# EAGLE board soundMeter_manual (EAGLE 6.3)
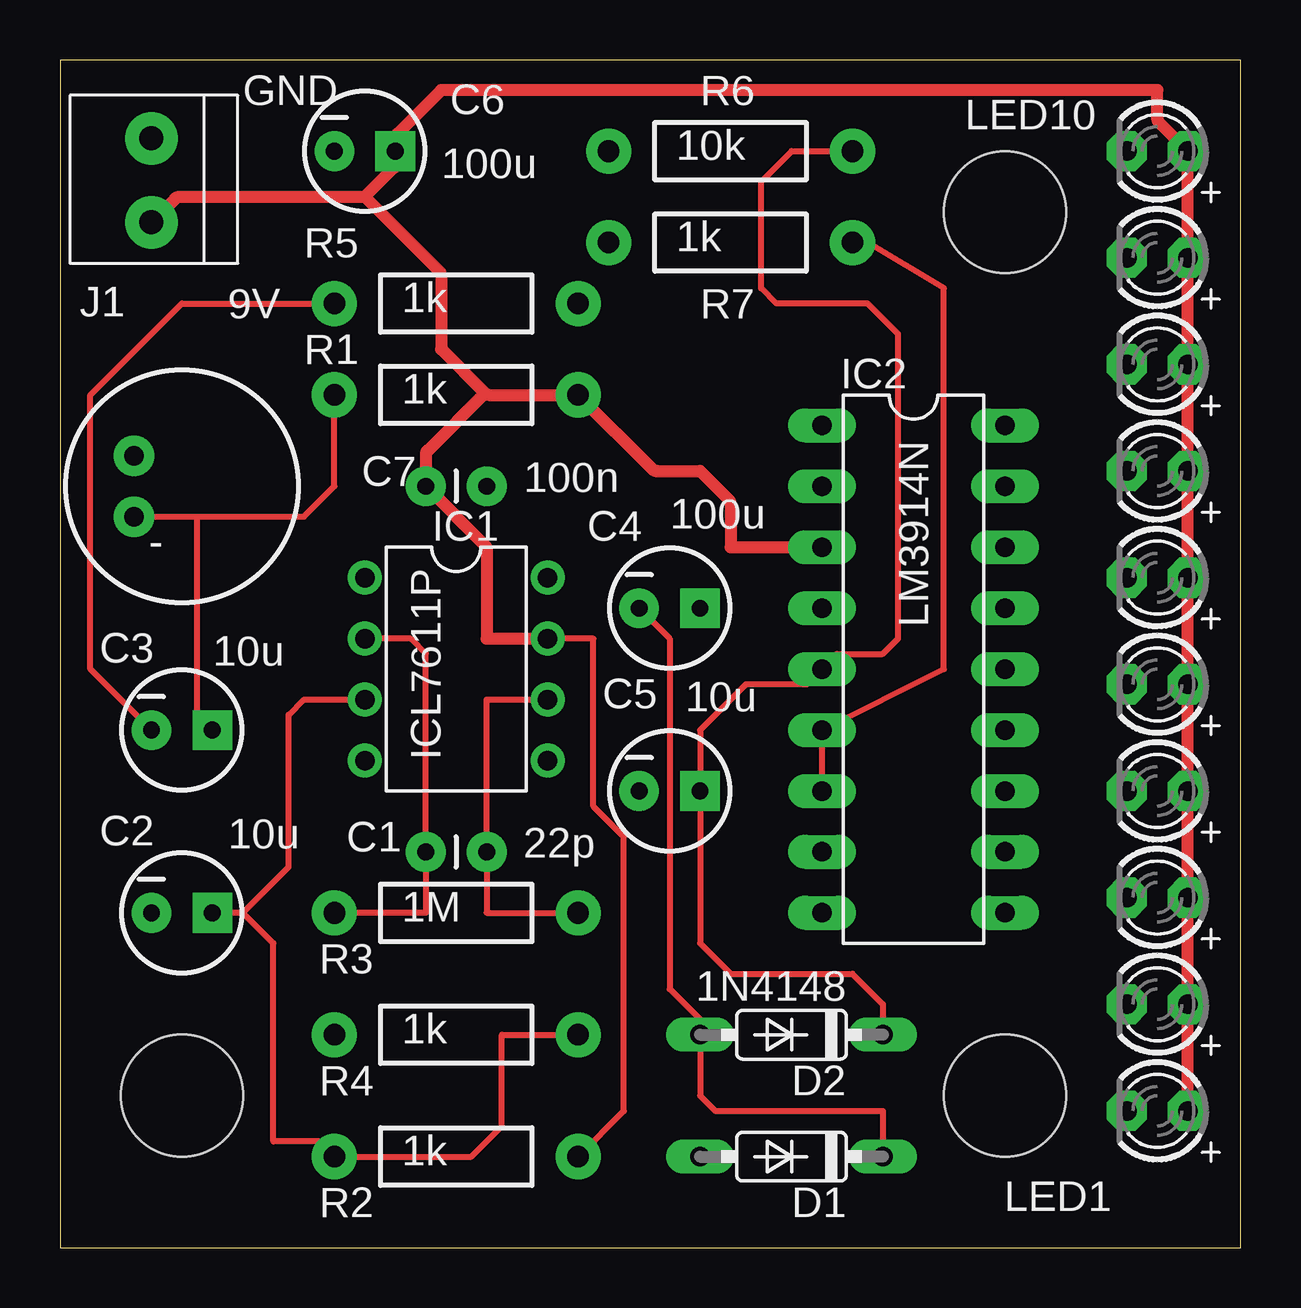
[diagram p0: board, top side]
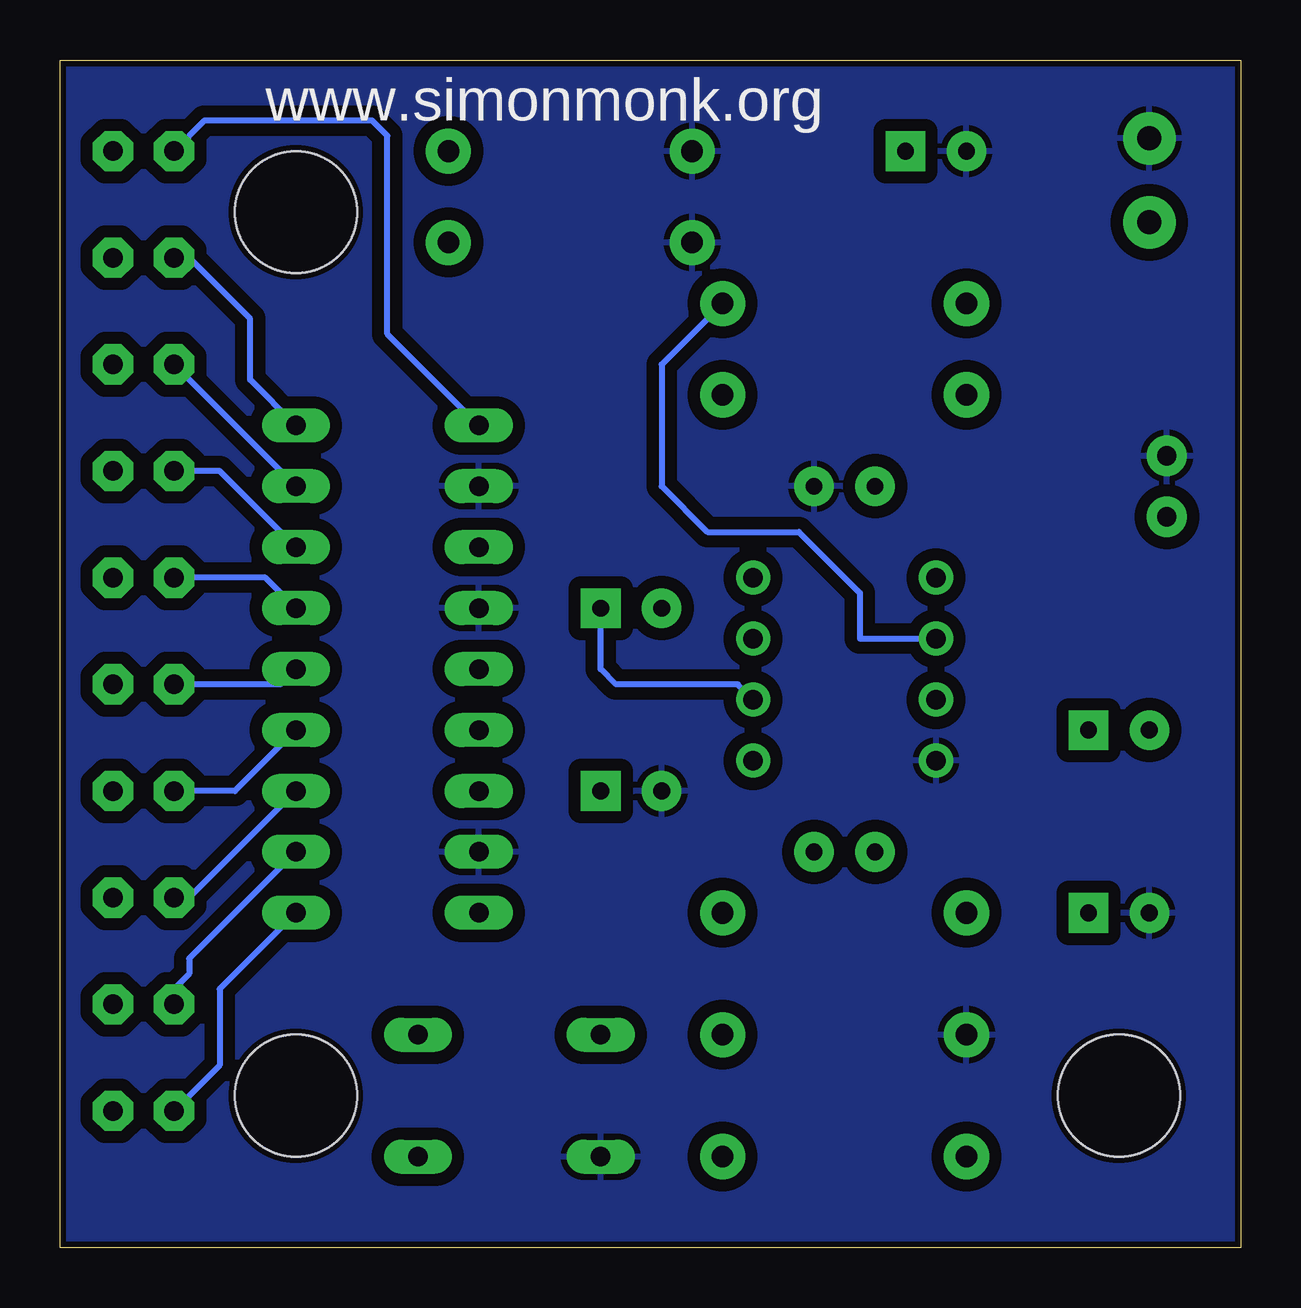
[diagram p1: board, bottom side, seen from below]

Size 49.2 x 49.52 mm. Coordinates in mm from the lower left corner, seen from the top.
Outline: 0,0 49.2,0 49.2,49.52 0,49.52 0,0
Copper layers (1*16): Top 0.035mm / dielectric 1.5mm / Bottom 0.035mm
Design rules "SparkFun": minimum track width 8mil, minimum drill 20mil, track to track 8mil, track to pad 8mil, pad to pad 8mil, via to via 8mil, smd to smd 8mil, copper to edge 10mil, drill to drill 8mil, minimum pad ring 12mil, minimum via ring 10mil, stop-mask expansion 4mil, vias tented up to drill 25mil, thermal gap 10mil
Net classes: 0 default: width 0.254 mm, clearance 0.254 mm; 1 supply: width 0.508 mm, clearance 0.508 mm
Holes 5.08 mm at 39.37,43.18 39.37,6.35 5.08,6.35

## Footprints (pad centres in the part's own frame; a part is rotated, then mirrored left to right if it is on the bottom)
CAP-PTH-SMALL = drill 0.7 pad 1.651: 1 0,0; 2 2.54,0
CPOL-RADIAL-10UF-25V = drill 0.7 pad 1.651 square: 1 1.27,0 | drill 0.7 pad 1.651: 2 -1.27,0
DO35-7 = drill 0.813 long: A 3.81,0; C -3.81,0
DIL08 = drill 0.813 pad 1.27: 1 -3.81,-3.81; 2 -1.27,-3.81; 3 1.27,-3.81; 4 3.81,-3.81; 5 3.81,3.81; 6 1.27,3.81; 7 -1.27,3.81; 8 -3.81,3.81
DIL18 = drill 0.813 long: 1 -10.16,-3.81; 2 -7.62,-3.81; 3 -5.08,-3.81; 4 -2.54,-3.81; 5 0,-3.81; 6 2.54,-3.81; 7 5.08,-3.81; 8 7.62,-3.81; 9 10.16,-3.81; 10 10.16,3.81; 11 7.62,3.81; 12 5.08,3.81; 13 2.54,3.81; 14 0,3.81; 15 -2.54,3.81; 16 -5.08,3.81; 17 -7.62,3.81; 18 -10.16,3.81
1X2-3.5MM = drill 1 pad 2.184: 1 1.8,0; 2 -1.7,0
LED3MM = drill 0.813 pad 1.676 octagon: A -1.27,0; K 1.27,0
MIC-9.7MM = drill 0.8 pad 1.676: 1 -2,1.27; 2 -2,-1.27
AXIAL-0.4 = drill 0.9 pad 1.88: P$1 -5.08,0; P$2 5.08,0

## Placement (x,y rotation side)
C1  22p  [CAP-PTH-SMALL]  15.24,16.51 0 top
C2  10u  [CPOL-RADIAL-10UF-25V]  5.08,13.97 0 top
C3  10u  [CPOL-RADIAL-10UF-25V]  5.08,21.59 0 top
C4  100u  [CPOL-RADIAL-10UF-25V]  25.4,26.67 0 top
C5  10u  [CPOL-RADIAL-10UF-25V]  25.4,19.05 0 top
C6  100u  [CPOL-RADIAL-10UF-25V]  12.7,45.72 0 top
C7  100n  [CAP-PTH-SMALL]  15.24,31.75 0 top
D1  1N4148  [DO35-7]  30.48,3.81 180 top
D2  1N4148  [DO35-7]  30.48,8.89 180 top
IC1  ICL7611P  [DIL08]  16.51,24.13 270 top
IC2  LM3914N  [DIL18]  35.56,24.13 270 top
J1  1X2-3.5MM  [1X2-3.5MM]  3.81,44.45 90 top
LED1  [LED3MM]  45.72,5.71 180 top
LED2  [LED3MM]  45.72,10.16 180 top
LED3  [LED3MM]  45.72,14.61 180 top
LED4  [LED3MM]  45.72,19.05 180 top
LED5  [LED3MM]  45.72,23.5 180 top
LED6  [LED3MM]  45.72,27.94 180 top
LED7  [LED3MM]  45.72,32.38 180 top
LED8  [LED3MM]  45.72,36.83 180 top
LED9  [LED3MM]  45.72,41.27 180 top
LED10  [LED3MM]  45.72,45.72 180 top
MIC1  MIC9.7MM  [MIC-9.7MM]  5.08,31.75 0 top
R1  1k  [AXIAL-0.4]  16.51,35.56 0 top
R2  1k  [AXIAL-0.4]  16.51,3.81 0 top
R3  1M  [AXIAL-0.4]  16.51,13.97 0 top
R4  1k  [AXIAL-0.4]  16.51,8.89 0 top
R5  1k  [AXIAL-0.4]  16.51,39.37 0 top
R6  10k  [AXIAL-0.4]  27.94,45.72 0 top
R7  1k  [AXIAL-0.4]  27.94,41.91 0 top

## Library data of the parts
C1-C7 = SparkFun-Capacitors
D1 D2 = diode
IC1 IC2 = linear
J1 LED1-LED10 = adafruit
MIC1 = SparkFun-Sensors
R1-R7 = SparkFun-Passives

## Nets
GND [supply]: C2.2 C5.2 C6.2 C7.2 D1.A IC1.4 IC2.2 IC2.4 IC2.8 J1.1 MIC1.1 R4.P$1 R6.P$1 R7.P$1
N$1: C4.2 D1.C D2.A
N$2: C3.1 MIC1.2 R1.P$1
N$3: C5.1 D2.C IC2.5 R6.P$2
N$4: C2.1 IC1.3 R2.P$1 R4.P$2
N$5 [supply]: C3.2 R5.P$1
N$6: C1.1 IC1.2 R3.P$1 R5.P$2
N$7: C1.2 C4.1 IC1.6 R3.P$2
N$8: IC2.6 IC2.7 R7.P$2
N$9: IC2.10 LED1.K
N$10: IC2.11 LED2.K
N$11: IC2.12 LED3.K
N$12: IC2.13 LED4.K
N$13: IC2.14 LED5.K
N$14: IC2.15 LED6.K
N$15: IC2.16 LED7.K
N$16: IC2.17 LED8.K
N$17: IC2.18 LED9.K
N$18: IC2.1 LED10.K
V+ [supply]: C6.1 C7.1 IC1.7 IC2.3 J1.2 LED1.A LED2.A LED3.A LED4.A LED5.A LED6.A LED7.A LED8.A LED9.A LED10.A R1.P$2 R2.P$2

## Tracks (layer width: path | path; a pad name or v marks a point on that pad's centre or on a via)
GND
  pour Bottom: 0,49.53 49.53,49.53 49.53,0 0,0
N$1
  Top 0.254: D1.C 34.29,5.71 27.3,5.71 26.67,6.35 D2.A 26.67,9.53 25.4,10.79 25.4,25.4 C4.2
N$2
  Top 0.254: MIC1.2 5.71,30.48 | 5.71,30.48 10.16,30.48 11.43,31.75 R1.P$1 | C3.1 5.71,22.23 5.71,30.48
N$3
  Top 0.254: D2.C 34.29,10.16 33.02,11.43 27.94,11.43 26.67,12.7 C5.1 26.67,21.59 28.57,23.5 31.11,23.5 IC2.5 32.38,24.77 34.29,24.77 34.92,25.4 34.92,38.1 33.66,39.37 29.84,39.37 29.21,40.01 29.21,44.45 30.48,45.72 R6.P$2
N$4
  Top 0.254: 7.62,13.97 8.89,12.7 8.89,4.45 10.79,4.45 R2.P$1 17.14,3.81 18.41,5.08 18.41,8.89 R4.P$2 | 7.62,13.97 C2.1 | 7.62,13.97 9.53,15.88 9.53,22.23 10.16,22.86 IC1.3
N$5
  Top 0.254: C3.2 1.27,24.13 1.27,35.56 5.08,39.37 R5.P$1
N$6
  Top 0.254: R3.P$1 15.24,13.97 C1.1 15.24,24.77 14.61,25.4 IC1.2
  Bottom 0.254: R5.P$2 24.13,36.83 24.13,31.75 22.23,29.84 18.41,29.84 15.88,27.3 15.88,25.4 IC1.2
N$7
  Top 0.254: R3.P$2 17.78,13.97 C1.2 17.78,22.86 IC1.6
  Bottom 0.254: IC1.6 20.95,23.5 26.04,23.5 26.67,24.13 C4.1
N$8
  Top 0.254: IC2.7 IC2.6 36.83,24.13 36.83,40.01 33.66,41.91 R7.P$2
N$9
  Bottom 0.254: IC2.10 42.55,10.79 42.55,7.62 LED1.K
N$10
  Bottom 0.254: IC2.11 43.81,12.06 43.81,11.43 44.45,10.79 LED2.K
N$11
  Bottom 0.254: IC2.12 43.81,14.61 LED3.K
N$12
  Bottom 0.254: IC2.13 41.91,19.05 LED4.K
N$13
  Bottom 0.254: IC2.14 40.01,23.5 LED5.K
N$14
  Bottom 0.254: IC2.15 40.64,27.94 LED6.K
N$15
  Bottom 0.254: IC2.16 42.55,32.38 LED7.K
N$16
  Bottom 0.254: IC2.17 LED8.K
N$17
  Bottom 0.254: IC2.18 41.27,36.2 41.27,38.73 43.81,41.27 LED9.K
N$18
  Bottom 0.254: IC2.1 35.56,38.1 35.56,46.35 36.2,46.99 43.18,46.99 LED10.K
V+
  Top 0.254: R2.P$2 23.5,5.71 23.5,17.14 22.23,18.41 22.23,25.4 IC1.7
  Top 0.508: J1.2 4.8,43.74 arc-45 4.98,43.81 12.7,43.81 | 12.7,43.81 13.9,45.01 arc45 13.97,45.19 C6.1 13.97,46.25 arc-45 14.04,46.43 15.88,48.26 45.72,48.26 45.72,47.09 arc45 45.79,46.92 LED10.A | 12.7,43.81 15.8,40.71 arc-45 15.88,40.53 15.88,37.47 17.71,35.63 | 17.71,35.63 arc45 17.89,35.56 R1.P$2 24.69,32.46 arc45 24.87,32.38 26.67,32.38 27.87,31.19 arc-45 27.94,31.01 27.94,29.21 IC2.3 | LED1.A LED2.A LED3.A LED4.A LED5.A LED6.A | LED6.A LED7.A LED8.A LED9.A LED10.A | LED6.A LED10.A | 17.71,35.63 15.31,33.24 arc45 15.24,33.06 C7.1 17.71,29.28 arc-45 17.78,29.11 17.78,25.4 IC1.7

## Text on the board
tPlace: GND | 9V
bPlace: www.simonmonk.org | www.simonmonk.org